# Altium PCB Logic-Analyzer-01.PcbDoc
Units mm, origin at the board's own origin, x right, y up, seen from the top; angles counter-clockwise.
Board outline 44 x 28 mm, 2 copper layers (Top Layer, Bottom Layer), stack 1.57 mm thick; 72 components, 58 nets, 254 pads, 50 vias.
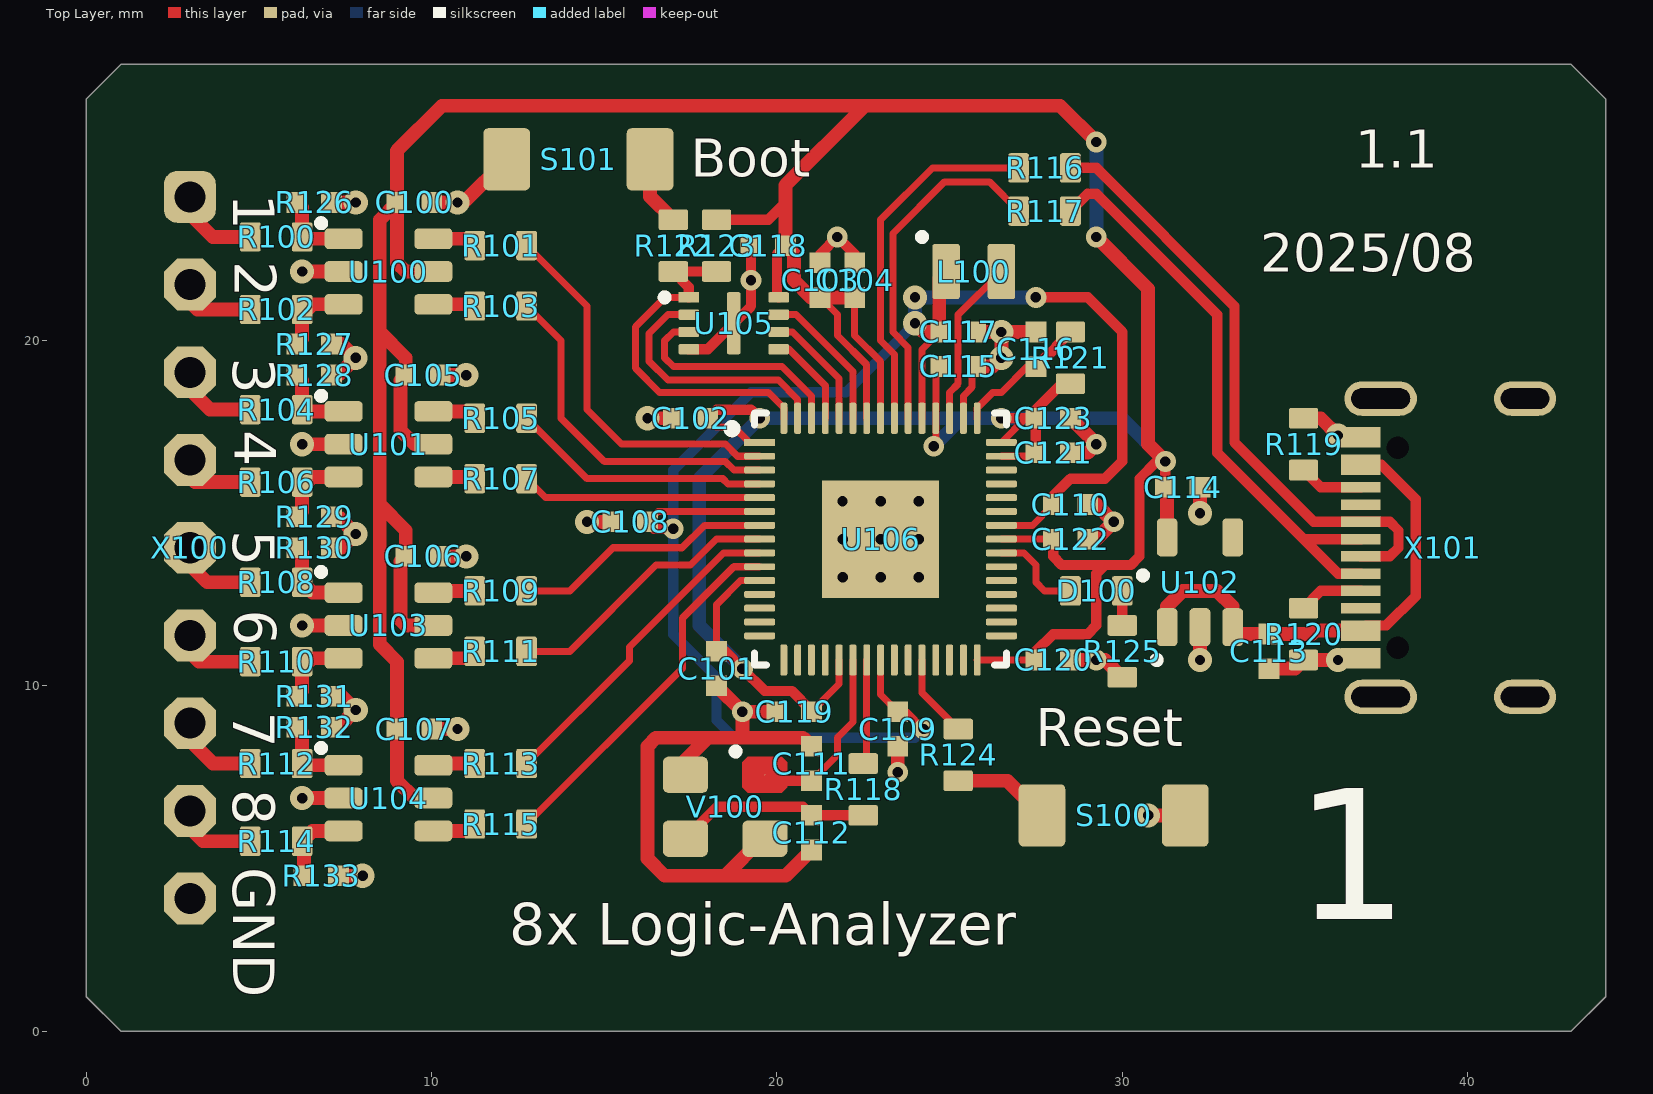
[diagram p0: Top Layer view]
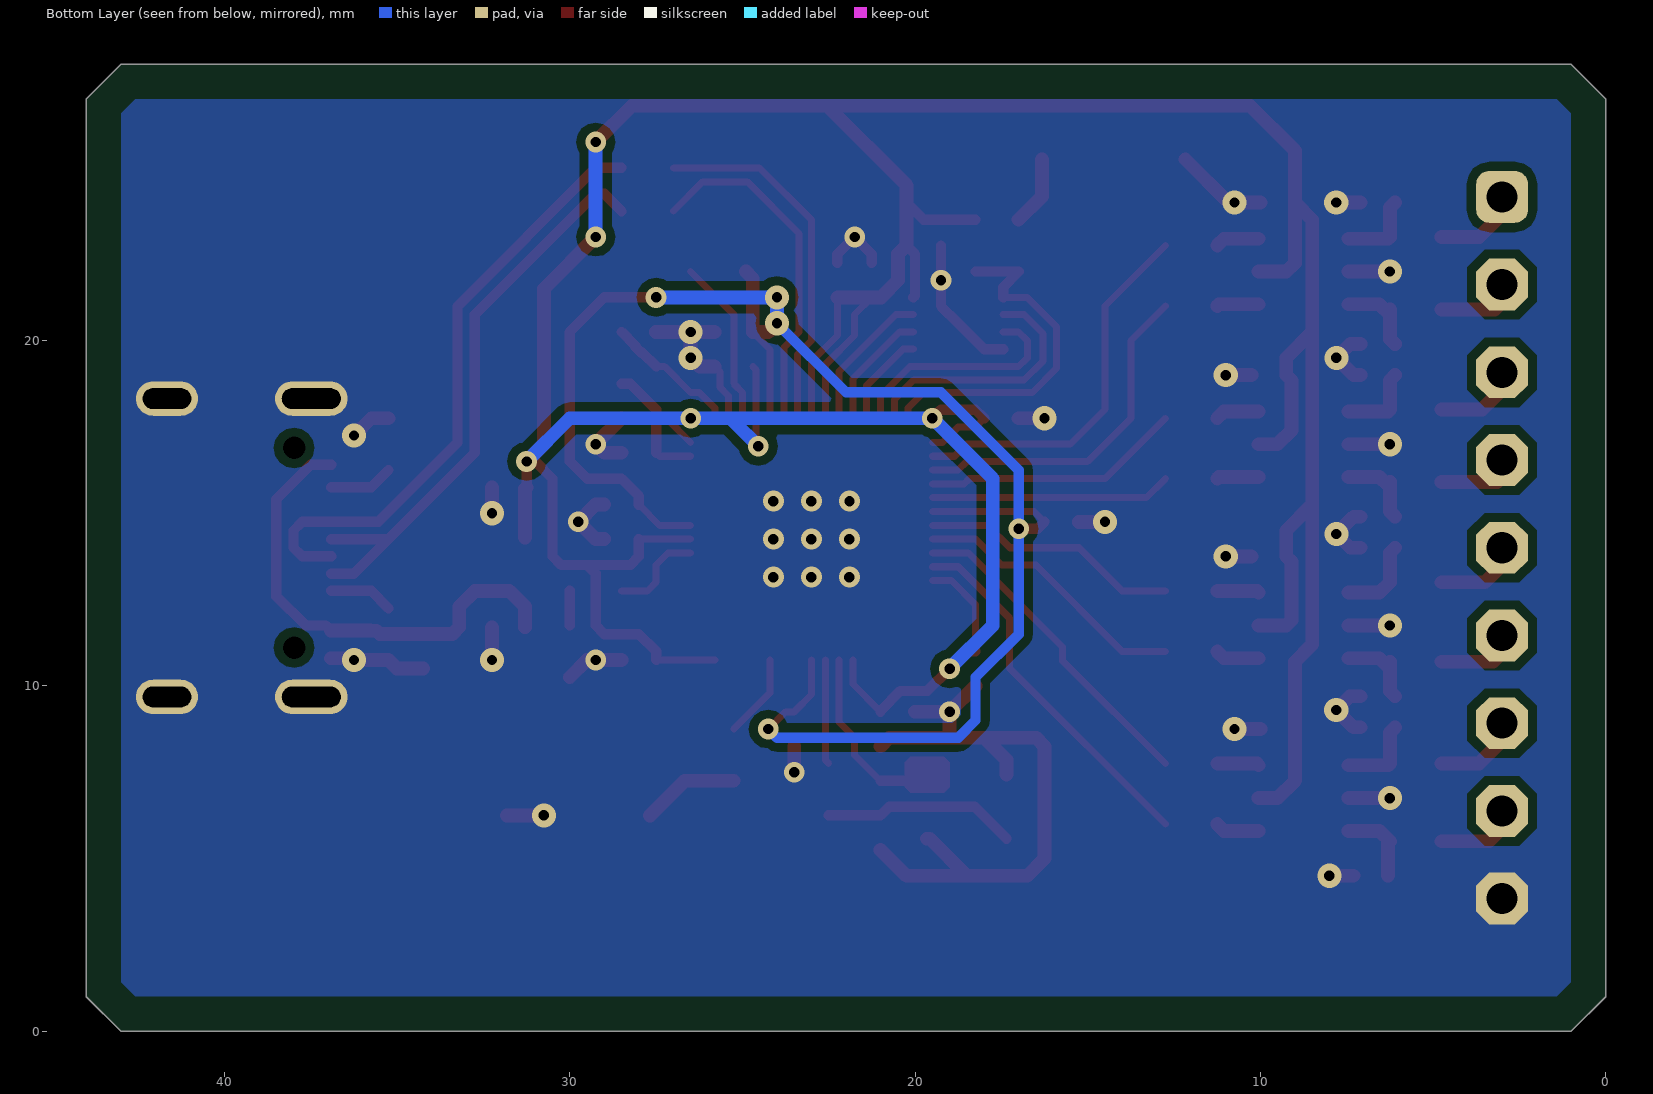
[diagram p1: Bottom Layer view, seen from below]
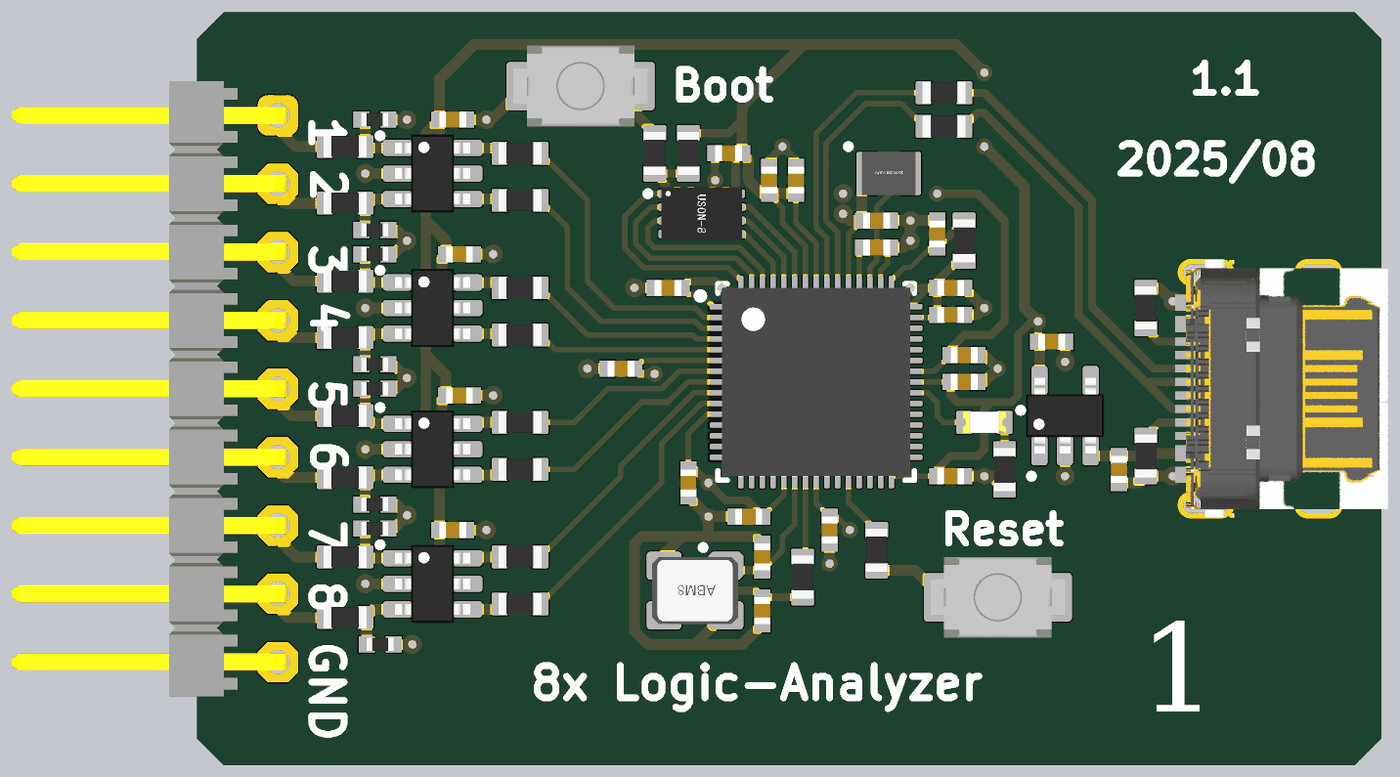
[diagram p2: 3D render of the assembled board from above, using the file's embedded part models]

## Layer stack, top to bottom
Top Solder: solder mask 0.01, Solder Resist, Dk 3.5
Top Layer: signal copper 0.035
Dielectric 1: dielectric 1.5, FR-4, Dk 4.8
Bottom Layer: signal copper 0.035
Bottom Solder: solder mask 0.01, Solder Resist, Dk 3.5

## Board outline
0,1 1,0 43,0 44,1 44,27 43,28 1,28 0,27

## Design rules (kind name [scope] priority, off if disabled: settings)
BoardOutlineClearance [All] p1: gap=1 ignorepadtopadclearanceinfootprint=FALSE except(1.5: THPad-OutlineEdge THPad-CavityEdge THPad-CutoutEdge THPad-SplitBarrior THPad-SplitContinuation)
Clearance 16 [InNet('12V')] p1: gap=0.254 ignorepadtopadclearanceinfootprint=FALSE except(0: Arc-Hole Track-Hole SMDPad-Hole THPad-Hole Via-Hole Fill-Hole Poly-Hole Region-Hole Text-Hole; 0.406: Arc-Poly Track-Poly SMDPad-Poly THPad-Poly Via-Poly Fill-Poly Poly-Poly)
Clearance [All] p2: gap=0.152 ignorepadtopadclearanceinfootprint=FALSE except(0: Arc-Hole Track-Hole THPad-Hole Via-Hole Fill-Hole Region-Hole Text-Hole; 0.254: Arc-Poly Track-Poly SMDPad-Poly THPad-Poly Via-Poly Fill-Poly Poly-Poly Poly-Hole) // 1
HoleSize [All] p1: absolutevalues=TRUE maxlimit=5.08 minlimit=0.3 maxpercent=80.000 minpercent=20.000
MinimumSolderMaskSliver [All] p1: minsoldermaskwidth=0.051
PasteMaskExpansion [All] p1 off: expansion=0
PolygonConnect [All] p1: connectstyle=Direct reliefconductorwidth=0.406 reliefentries=4 polygonreliefangle="90 Angle" airgapwidth=0.254
RoutingVias [All] p1: holewidth=0.3 width=0.6 viastyle="Through Hole" minholewidth=0.3 minwidth=0.6 maxholewidth=4 maxwidth=5
SilkToBoardRegionClearance [All] p1 off:
SilkToSilkClearance [All] p1 off: silktosilkclearance=0.254
SilkToSolderMaskClearance [IsPad] p1 off: minsilkscreentomaskgap=0.254 clearancetoexposedcopper=TRUE
SolderMaskExpansion [All] p1: expansion=0.051 istentingtop=FALSE
Width [All] p1: maxlimit=2.54 minlimit=0.203 preferedwidth=0.406 minimp=50.000000 maximp=50.000000 favimp=50.000000
24 further rules are at their usual default settings.

## Components (designator, comment, footprint, x,y, rotation, side; value= is the part's Value field where it differs from the comment)
C100 "100n" CAPC1005X06N#1 9.5,24 r180 top
C101 "100n" CAPC1005X06N#1 18.25,10.5 r90 top
C102 "100n" CAPC1005X06N#1 17.5,17.75 r0 top
C103 "100n" CAPC1005X06N#1 21.25,21.75 r270 top
C104 "100n" CAPC1005X06N#1 22.25,21.75 r270 top
C105 "100n" CAPC1005X06N#1 9.75,19 r180 top
C106 "100n" CAPC1005X06N#1 9.75,13.75 r180 top
C107 "100n" CAPC1005X06N#1 9.5,8.75 r180 top
C108 "100n" CAPC1005X06N#1 15.75,14.75 r0 top
C109 "100n" CAPC1005X06N#1 23.5,8.75 r90 top
C110 "100n" CAPC1005X06N#1 28.5,15.25 r180 top
C111 "15p" CAPC1005X06N#1 21,7.75 r270 top
C112 "15p" CAPC1005X06N#1 21,5.75 r90 top
C113 "4µ7" CAPC1005X06N#1 34.25,11 r90 top
C114 "4µ7" CAPC1005X06N#1 31.75,15.75 r180 top
C115 "4µ7" CAPC1005X06N#2 25.25,19.25 r180 top
C116 "4µ7" CAPC1005X06N#1 27.5,19.75 r270 top
C117 "4µ7" CAPC1005X06N#2 25.25,20.25 r180 top
C118 "100n" CAPC1005X06N#1 19.75,22.75 r0 top
C119 "100n" CAPC1005X06N#1 20.5,9.25 r0 top
C120 "100n" CAPC1005X06N#1 28,10.75 r180 top
C121 "100n" CAPC1005X06N#1 28,16.75 r180 top
C122 "100n" CAPC1005X06N#1 28.5,14.25 r180 top
C123 "100n" CAPC1005X06N#1 28,17.75 r180 top
D100 "red" DIOC1608X06N_LED 29.25,12.75 r180 top
L100 "AOTA-B201610S3R3-101-T" PowerInductor_2.0x1.6 25.7,22 r0 top
R100 "51" RESC1608X06L 5.5,23 r0 top
R101 "51" RESC1608X06L 12,22.75 r0 top
R102 "51" RESC1608X06L 5.5,20.9 r0 top
R103 "51" RESC1608X06L 12,21 r0 top
R104 "51" RESC1608X06L 5.5,18 r0 top
R105 "51" RESC1608X06L 12,17.75 r0 top
R106 "51" RESC1608X06L 5.5,15.9 r0 top
R107 "51" RESC1608X06L 12,16 r0 top
R108 "51" RESC1608X06L 5.5,13 r0 top
R109 "51" RESC1608X06L 12,12.75 r0 top
R110 "51" RESC1608X06L 5.5,10.7 r0 top
R111 "51" RESC1608X06L 12,11 r0 top
R112 "51" RESC1608X06L 5.5,7.75 r0 top
R113 "51" RESC1608X06L 12,7.75 r0 top
R114 "51" RESC1608X06L 5.5,5.5 r0 top
R115 "51" RESC1608X06L 12,6 r0 top
R116 "27R" RESC1608X06L 27.75,25 r180 top
R117 "27R" RESC1608X06L 27.75,23.75 r180 top
R118 "1k" RESC1608X06L 22.5,7 r270 top
R119 "5k1" RESC1608X06L 35.25,17 r270 top
R120 "5k1" RESC1608X06L 35.25,11.5 r90 top
R121 "27R" RESC1608X06L 28.5,19.5 r270 top
R122 "1k" RESC1608X06L 17,22.75 r270 top
R123 "10k" RESC1608X06L 18.25,22.75 r90 top
R124 "1k" RESC1608X06L 25.25,8 r90 top
R125 "10k" RESC1608X06L 30,11 r270 top
R126 "100k" RESC1005X06N 6.6,24 r0 top
R127 "100k" RESC1005X06N 6.6,19.9 r0 top
R128 "100k" RESC1005X06N 6.6,19 r0 top
R129 "100k" RESC1005X06N 6.6,14.9 r0 top
R130 "100k" RESC1005X06N 6.6,14 r0 top
R131 "100k" RESC1005X06N 6.6,9.7 r0 top
R132 "100k" RESC1005X06N 6.6,8.8 r0 top
R133 "100k" RESC1005X06N 6.8,4.5 r0 top
S100 "TS-1088-AR02016" TS-1088-AR02016 29.75,6.25 r0 top
S101 "TS-1088-AR02016" TS-1088-AR02016 14.25,25.25 r180 top
U100 "74LVC2G17" SOT95P280X110-6N 8.75,22 r0 top
U101 "74LVC2G17" SOT95P280X110-6N 8.75,17 r0 top
U102 "TPLP5907MFX-3.3" SOT95P280X110-5N 32.25,13 r90 top
U103 "74LVC2G17" SOT95P280X110-6N 8.75,11.75 r0 top
U104 "74LVC2G17" SOT95P280X110-6N 8.75,6.75 r0 top
U105 "XT25F16FDTIGT-S" USONP50X200X300X8N 18.75,20.5 r0 top
U106 "RP2350A" QFN40P700X700X085-60EP 23,14.25 r0 top
V100 "12MHz" ABM8 18.5,6.5 r180 top
X100 "1x9 2,54mm" PINH_1x09_2_54mm_RA 3,14 r270 top
X101 "USB-C_16p" USBC_16P 40.5,14 r90 top

## Footprints (in the part's own frame and the unit in brackets; to place one, negate y for a bottom-side part, rotate by r counter-clockwise, add the part's x,y. Pads: shape width x height; smd on the part's side, far side on the other; paste and mask are expansions set on the pad)
ABM8 [mm]
  round 0.025 smd: 1(-1.15,-0.925)
  rrect30% 1.3x1.05 smd: 2(1.15,-0.925) 3(1.15,0.925) 4(-1.15,0.925)
  Top Layer region: -0.657,-1.45 -0.5,-1.292 -0.5,-0.557 -0.657,-0.4 -1.643,-0.4 -1.8,-0.557 -1.8,-1.292 -1.643,-1.45
  silkscreen extent -0.38,-1.67 -0.23,-1.53, body extent -1.6,-1.25 1.6,1.25, height 0.8
CAPC1005X06N#1 [mm] "Chip Capacitor, 2-Leads, Body 1,0x0,5mm, IPC Medium Density"
  rect 0.6x0.6 smd: 1(-0.5,0) 2(0.5,0)
  body extent -0.5,-0.3 0.5,0.3, height 0.5
CAPC1005X06N#2 [mm] "Chip Capacitor, 2-Leads, Body 1,0x0,5mm, IPC Medium Density"
  rect 0.5x0.6 smd: 1(-0.55,0) 2(0.55,0)
  body extent -0.5,-0.3 0.5,0.3, height 0.5
DIOC1608X06N_LED [mm]
  rrect20% 0.6x0.85 smd: 1(-0.75,0) 2(0.75,0)
  body extent -0.8,-0.4 0.8,0.4, height 0.7
PINH_1x09_2_54mm_RA [mm] "Pin-Header 9, right angled"
  rrect50% 1.5x1.5 hole 0.9: 1(-10.16,0)
  oct 1.5x1.5 hole 0.9: 2(-7.62,0) 3(-5.08,0) 4(-2.54,0) 5(0,0) 6(2.54,0) 7(5.08,0) 8(7.62,0) 9(10.16,0)
  body extent -11.43,-9.88 11.43,0.34, height 3.07
PowerInductor_2.0x1.6 [mm]
  rrect20% 0.8x1.6 smd: 1(-0.8,0) 2(0.8,0)
  silkscreen extent -1.57,0.93 -1.42,1.07, body extent -1,-0.8 1,0.8, height 1
QFN40P700X700X085-60EP [mm]
  rect 0.9x0.2 smd mask+0.1: 1(-3.5,2.8)
  rrect50% 0.9x0.2 smd mask+0.1: 2(-3.5,2.4) 3(-3.5,2) 4(-3.5,1.6) 5(-3.5,1.2) 6(-3.5,0.8) 7(-3.5,0.4) 8(-3.5,0) 9(-3.5,-0.4) 10(-3.5,-0.8) 11(-3.5,-1.2) 12(-3.5,-1.6) 13(-3.5,-2) 14(-3.5,-2.4) 15(-3.5,-2.8)
  rrect50% 0.2x0.9 smd: 16(-2.8,-3.5) 17(-2.4,-3.5) 18(-2,-3.5) 19(-1.6,-3.5) 20(-1.2,-3.5) 21(-0.8,-3.5) 22(-0.4,-3.5) 23(0,-3.5) 24(0.4,-3.5) 25(0.8,-3.5) 26(1.2,-3.5) 27(1.6,-3.5) 28(2,-3.5) 29(2.4,-3.5) 30(2.8,-3.5) 46(2.8,3.5) 47(2.4,3.5) 48(2,3.5) 49(1.6,3.5) 50(1.2,3.5) 51(0.8,3.5) 52(0.4,3.5) 53(0,3.5) 54(-0.4,3.5) 55(-0.8,3.5) 56(-1.2,3.5) 57(-1.6,3.5) 58(-2,3.5) 59(-2.4,3.5) 60(-2.8,3.5)
  rrect50% 0.9x0.2 smd: 31(3.5,-2.8) 32(3.5,-2.4) 33(3.5,-2) 34(3.5,-1.6) 35(3.5,-1.2) 36(3.5,-0.8) 37(3.5,-0.4) 38(3.5,0) 39(3.5,0.4) 40(3.5,0.8) 41(3.5,1.2) 42(3.5,1.6) 43(3.5,2) 44(3.5,2.4) 45(3.5,2.8)
  rect 3.4x3.4 smd: 61(0,0)
  silkscreen extent -4.42,-3.65 3.65,3.65, body extent -3.5,-3.5 3.5,3.5, height 0.85
RESC1005X06N [mm] "Chip Capacitor, 2-Leads, Body 1,0x0,5mm, IPC Medium Density"
  rect 0.6x0.6 smd: 1(-0.5,0) 2(0.5,0)
  body extent -0.5,-0.25 0.5,0.25, height 0.3
RESC1608X06L [mm] "Chip Resistor, 2-Leads, Body 1,6x0,8mm, IPC High Density"
  rrect20% 0.6x0.85 smd: 1(-0.75,0) 2(0.75,0)
  body extent -0.8,-0.4 0.8,0.4, height 0.4
SOT95P280X110-5N [mm] "SOT23, 5-Leads, Body 3,0x3,0mm (max), Pitch 0,95mm, IPC Medium Density"
  rrect40% 1.1x0.6 smd: 1(-1.3,0.95) 2(-1.3,0) 3(-1.3,-0.95) 4(1.3,-0.95) 5(1.3,0.95)
  body extent -1.4,-1.45 1.4,1.45, height 1.45
SOT95P280X110-6N [mm] "SOT23, 6-Leads, Body 3,0x3,0mm (max), Pitch 0,95mm, IPC Medium Density"
  rrect40% 1.1x0.6 smd: 1(-1.3,0.95) 2(-1.3,0) 3(-1.3,-0.95) 4(1.3,-0.95) 5(1.3,0) 6(1.3,0.95)
  body extent -1.4,-1.45 1.4,1.45, height 1.45
TS-1088-AR02016 [mm] "Tact Switch, 4x3x2"
  rrect20% 1.35x1.8 smd: 1(-2.075,0) 2(2.075,0)
  body extent -2.5,-1.5 2.5,1.5, height 2
USBC_16P [mm]
  round 0 hole 0.65 unplated: 1(-2.89,2.515) 1(2.89,2.515)
  rect 0.6x1.15 smd paste+0 mask+0: A1-B12(-3.2,3.59) A4-B9(-2.4,3.59) B1-A12(3.2,3.59) B4-A9(2.4,3.59)
  rect 0.3x1.15 smd paste+0 mask+0: A5(-1.25,3.59) A6(-0.25,3.59) A7(0.25,3.59) A8(1.25,3.59) B5(1.75,3.59) B6(0.75,3.59) B7(-0.75,3.59) B8(-1.75,3.59)
  rrect100% 1x1.8 hole 1.4 slot 0.6 at 0 deg paste-2539.97 mask+0: SHIELD(-4.32,-1.165) SHIELD(4.32,-1.165)
  rrect100% 1x2.1 hole 1.7 slot 0.6 at 0 deg paste-2539.97 mask+0: SHIELD(-4.32,3.015) SHIELD(4.32,3.015)
  body extent -4.79,-3.76 4.79,3.77, height 3.26
USONP50X200X300X8N [mm]
  rect 0.6x0.3 smd mask+0.05: 1(-1.3,0.75)
  rrect30% 0.6x0.3 smd mask+0.05: 2(-1.3,0.25) 3(-1.3,-0.25) 4(-1.3,-0.75) 5(1.3,-0.75) 6(1.3,-0.25) 7(1.3,0.25) 8(1.3,0.75)
  rrect30% 0.4x1.8 smd mask+0.05: 9(0,0)
  silkscreen extent -2.07,0.68 -1.92,0.82, body extent -1.5,-1 1.5,1, height 0.53

## Part data
C100 C101 C102 C103 C104 C105 C106 C107 C108 C109 C110 C111 C112 C113 C114 C115 C116 C117 C118 C119 C120 C121 C122 C123: library part CAPC_0402, "0402 Chip Capacitor", Categorie=generic, Date=19.07.2025, Editor=rriedel, Group=Capacitor, PackageDescription=0402, Part Number=CAPC_0402, Status=tested, Type=unpolarized
D100: library part LED_0603, "LED, 0603", Categorie=generic, Date=29.06.2020, Editor=rriedel, Group=Diode, PackageDescription=0603, Part Number=LED_0603, Status=tested, Type=generic
L100: "3.3µH, 2.8A, 2.0mm x 1.6mm x 1.0mm", Manufacturer=Abracom, Categorie=Part, Date=17.08.2025, Distributor_1=JLCBCP, Distributor_1_Part_Number=C42411119, Editor=rriedel, Group=Inductor, PackageDescription="2.0mm x 1.6mm", Part Number=AOTA-B201610S3R3-101-T, Part_Number_1=AOTA-B201610S3R3-101-T, Status=new, Type=Power
R100 R101 R102 R103 R104 R105 R106 R107 R108 R109 R110 R111 R112 R113 R114 R115 R116 R117 R118 R119 R120 R121 R122 R123 R124 R125: library part RESC_0603, "0603 Chip Resistor", Categorie=generic, Editor=rriedel, Group=Resistor, PackageDescription=0603, Part Number=RESC_0603, Status=tested, Type=generic
R126 R127 R128 R129 R130 R131 R132 R133: library part RESC_0402, "0402 Chip Resistor", Categorie=generic, Date=19.07.2025, Editor=rriedel, Group=Resistor, PackageDescription=0402, Part Number=RESC_0402, Status=tested, Type=generic
S100 S101: "Tact Switch, 4x3x2, 2pin, 12V/50mA", Manufacturer=XunPu, Categorie=Part, Date=04.06.2022, Distributor_1=LCSC, Distributor_1_Part_Number=C720477, Editor=rriedel, Group=Electromechanical, PackageDescription="4mm x 3mm", Part Number=TS-1088-AR02016, Part_Number_1=TS-1088-AR02016, Status=tested, Type=Switch
U100 U101 U103 U104: "Dual Schmitt-Trigger Buffer with 5.5V tolerant inputs", Manufacturer=TI, Categorie=Part, Date=08.05.2020, Distributor_1=Digi-Key, Distributor_1_Part_Number=296-SN74LVC2G17DBVRCT-ND‎, Editor=rriedel, Group=IC, PackageDescription=SOT23-6, Part Number=74LVC2G17, Part_Number_1=74LVC2G17DBVR, Status=tested, Type=Logic
U102: library part MIC5233-3.3, "100 mA LDO,  Vout= 3,3V, -40°C..125°C", Manufacturer=Microchip, Bauteilart=IC, Date=15.09.2016, Distributor_1=Farnell, Distributor_1_Part_Number=2510274, Editor=rriedel, Kategorie=Part, PackageDescription=SOT23-5, Part Number=MIC5233-3.3, Part_Number_1=MIC5233-3.3YM5, Status=tested, Unterart=Linear-Regulators
U105: "SPI NOR FLASH, 16MBit", Manufacturer=XTX, Categorie=Part, Date=17.07.2025, Distributor_1=JLCBCP, Distributor_1_Part_Number=C29781641, Editor=rriedel, Group=IC, PackageDescription=USON8, Part Number=XT25F16FDTIGT-S, Part_Number_1=XT25F16FDTIGT-S, Status=tested, Type=Memory
U106: "32-bit Microcontroller, 2x 150MHz Cortex M33", Manufacturer=Raspberry, Categorie=Part, Date=17.07.2025, Editor=rriedel, Group=MicroController, PackageDescription=QFN60EP, Part Number=RP2350A, Part_Number_1=RP2350A, Status=tested, Type="32bit Raspberry"
V100: library part ABM8-272-T3, "-40℃~+85℃, 12MHz, Cl=10pF, ±30ppm, SMD3225-4P", Manufacturer=Abracom, Categorie=Part, Date=17.08.2025, Distributor_1=JLCBCP, Distributor_1_Part_Number=C20625731, Editor=rriedel, Group=Crystal, PackageDescription="3.2mm x 2.5mm", Part Number=ABM8-272-T3, Part_Number_1=ABM8-272-T3, Status=new, Type=Misc
X100: library part PINH_1x9_2_54, "Pin-Header 2,54 mm 9pins", Categorie=generic, Date=11.05.2025, Editor=rriedel, Group=Connector, Part Number=PINH_1x9_2_54, Status=tested, Type=Pin-Header
X101: "SMD USB-C 16p", Categorie=Part, Date=19.07.2025, Distributor_1=JLCBCP, Distributor_1_Part_Number=C2765186, Editor=rriedel, Group=Connector, PackageDescription=USB-C_16p, Part Number=USB-C_16p, Status=tested, Type=USB

## Via types
v1: diameter 0.7, hole 0.3, Top Layer to Bottom Layer, tented both sides, 24 vias
v2: diameter 0.6, hole 0.3, Top Layer to Bottom Layer, tented both sides, 17 vias
v3: diameter 0.61, hole 0.305, Top Layer to Bottom Layer, tented both sides, 8 vias
v4: diameter 0.61, hole 0.3, Top Layer to Bottom Layer, tented both sides, 1 vias

## Nets (pads, with @x,y where several pads share a name; then routed paths per layer and width w, separated by ;. In a path a pad name is that pad's centre, name@x,y a point inside that pad or via, vN(x,y) a via of type N, cw(c..) or ccw(c..) an arc to the next point about the centre after c; other vN are vias at no path point)
1V1: C108.2 C109.2 C110.2 C117.2 L100.1 U106.6 U106.23 U106.39 U106.50 | length 50.4
  Top Layer w0.203: C108.2 16.55,15.05 U106.6 ; U106.23 23,9.75 C109.2 23.75,9.25 v2(24.25,8.75) ; U106.50 24.2,18.841 24.196,18.845 24.196,19.746 C117.2 ; U106.39 27.4,14.65 C110.2
  Top Layer w0.3: C108.2 16.446,14.554 v2(17,14.554) ; v2(27.5,21.25) 29,21.25 30,20.25 30,16.5 29.5,16 28.5,16 28,15.5 C110.2
  Top Layer w0.4: v1(24,20.5) 24.25,20.25 C117.2 24.7,21.8 L100.1
  Bottom Layer w0.3: v1(24,20.5) 22,18.5 19.25,18.5 17,16.25 v2(17,14.554) 17,11.5 18.25,10.25 18.25,9 18.75,8.5 24,8.5 v2(24.25,8.75)
  Bottom Layer w0.4: v1(24,20.5) v1(24,21.25) v2(27.5,21.25)
3V3: C100.2 C101.2 C102.2 C103.2 C104.2 C105.2 C106.2 C107.2 C114.2 C115.2 C118.2 C119.2 C120.2 C121.2 C122.2 C123.2 R121.2 R123.2 U100.5 U101.5 U102.5 U103.5 U104.5 U105.8 U106.1 U106.11 U106.20 U106.30 U106.38 U106.44 U106.45 U106.49 U106.53 U106.54 | length 140.5
  Top Layer w0.203: C102.2 18.25,17.5 18.75,17.5 19.2,17.05 U106.1 ; C101.2 18.25,12.35 18.95,13.05 U106.11 ; C119.2 21.8,10.05 U106.20 ; C103.2 21.75,20.75 21.75,20.15 22.6,19.3 U106.54 ; C104.2 22.25,20.15 23,19.4 U106.53 ; v2(24.542,16.941) 24.6,16.999 U106.49 24.6,19.15 C115.2 ; U106.30 C120.2 ; U106.38 C122.2 ; U106.44 27.4,16.65 C121.2 ; U106.45 C123.2@27.2,17.75
  Top Layer w0.3: C102.2 18.25,18 19.25,18 v2(19.5,17.75) ; C101.2 18.5,11 v2(19,10.5) 19.648,9.852 20.425,9.852 21,9.278 C119.2 ; R123.2 19.75,23.5 20.25,24 ; U105.8 20,21.3 20,22.5 C118.2 ; v2(26.5,17.75) 27.2,17.75 C123.2 ; C120.2 27.5,11 28,11.5 29,11.5 29.25,11.75 29.25,13.25 29.5,13.5 ; C121.2 C123.2 ; C122.2 28,13.75 28.25,13.5 29.5,13.5 ; R121.2 28.25,18.75 27.5,18 C123.2 ; C114.2 v2(31.25,16.5) 31,16.5 30.5,16 30.5,13.75 30.25,13.5 29.5,13.5
  Top Layer w0.4: U104.5 9.5,6.75 9,7.25 C107.2 9,10.7 8.5,11.2 8.5,15.25 ; U103.5 9.25,11.75 9.1,11.9 9.1,13.6 C106.2 9.25,14.5 8.5,15.25 ; U101.5 9.5,17 9.1,17.4 9.1,18.85 C105.2 9.25,19.5 8.5,20.25 ; U100.5 9.25,22 9,22.25 C100.2 ; C104.2 C103.2 20.987,21.25 20.491,21.746 20.491,22.509 C118.2 20.25,24 20.25,24.5 22.5,26.75 22.45,26.8 ; v2(29.25,23) 30.75,21.5 30.75,17 31.125,16.625 v2(31.25,16.5) ; v2(29.25,25.75) 28.2,26.8 22.45,26.8 ; C114.2 31.3,15.7 U102.5 ; 8.5,15.25 8.5,20.25 ; 8.5,20.25 8.5,23.5 C100.2 ; C100.2 9,25.5 10.3,26.8 22.45,26.8
  Bottom Layer w0.4: v2(19,10.5) 17.75,11.75 17.75,16 v2(19.5,17.75) 25.25,17.75 ; v2(24.542,16.941) 25.25,17.649 25.25,17.75 ; v2(29.25,23) v2(29.25,25.75) ; v2(31.25,16.5) 30,17.75 v2(26.5,17.75) 25.25,17.75
GND: C100.1 C101.1 C102.1 C103.1 C104.1 C105.1 C106.1 C107.1 C108.1 C109.1 C110.1 C111.1 C112.1 C113.1 C114.1 C115.1 C116.1 C117.1 C118.1 C119.1 C120.1 C121.1 C122.1 C123.1 R119.1 R120.1 R125.2 R126.2 R127.2 R128.2 R129.2 R130.2 R131.2 R132.2 R133.2 S100.2 S101.2 U100.2 U101.2 U102.2 U103.2 U104.2 U105.4 U105.9 U106.47 U106.61 V100.2 V100.4 X100.9 X101.A1-B12 X101.B1-A12 X101.SHIELD | length 61.1
  Top Layer w0.203: U106.47 25.4,18.397 25.652,18.649 25.652,19.102 C115.1
  Top Layer w0.3: U105.4 18,19.75 U105.9 19.25,21 v2(19.25,21.75) C118.1 ; C103.1 21.25,22.5 v2(21.75,23) 22.25,22.5 C104.1
  Top Layer w0.4: v1(6.25,6.75) U104.2 ; v1(6.25,11.75) U103.2 ; v1(6.25,17) U101.2 ; v1(6.25,22) U100.2 ; R132.2 7.3,8.8 v1(7.8,9.3) 7.4,9.7 R131.2 ; R130.2 7.398,14 v1(7.798,14.4) 7.298,14.9 R129.2 ; R128.2 7.298,19 v1(7.798,19.5) 7.398,19.9 R127.2 ; R126.2 v1(7.8,24) ; R133.2 v1(8,4.5) ; C107.1 v1(10.75,8.75) ; C100.1 v1(10.75,24) 10.925,24 S101.2 ; C106.1 v1(11,13.75) ; C105.1 v1(11,19) ; v1(14.5,14.75) C108.1 ; v1(16.25,17.75) C102.1 ; V100.2 17.35,7.85 18,8.5 ; C101.1 v2(19,9.25) ; V100.4 19.575,5.575 18.5,4.5 ; C119.1 v2(19,9.25) ; C112.1 20.25,4.5 18.5,4.5 ; C111.1 20.75,8.5 19,8.5 ; v2(23.5,7.5) C109.1 ; C115.1 26.25,19.25 v1(26.5,19.5) v1(26.5,20.25) ; C117.1 v1(26.5,20.25) ; C116.1 v1(26.5,20.25) ; C120.1 v2(29.25,10.75) 29.5,10.75 R125.2 ; C121.1 29,16.75 v2(29.25,17) C123.1 ; C122.1 29.25,14.25 v2(29.75,14.75) 29.25,15.25 C110.1 ; v1(30.75,6.25) S100.2 ; v1(32.25,10.75) U102.2 ; v1(32.25,15) C114.1 ; C113.1 35,10.5 R120.1 v1(36.25,10.75) 36.3,10.8 X101.A1-B12 ; R119.1 35.75,17.75 v1(36.25,17.25) ; 18,8.5 19,8.5 ; 18,8.5 16.5,8.5 16.25,8.25 16.25,5 16.75,4.5 18.5,4.5 ; 19,8.5 v2(19,9.25)
  other v3: 21.9,13.15 23,13.15 24.1,13.15 21.9,14.25 23,14.25 24.1,14.25 23,15.35 24.1,15.35
  other v4: 21.9,15.35
IN_01: R101.2 U106.2 | length 11
  Top Layer w0.203: R101.2 14.5,21 14.5,18 15.5,17 18.506,17 18.856,16.65 U106.2
IN_02: R103.2 U106.3 | length 10
  Top Layer w0.203: R103.2 13.75,20 13.75,17.75 15,16.5 18.503,16.5 18.753,16.25 U106.3
IN_03: R105.2 U106.4 | length 7.5
  Top Layer w0.203: R105.2 14.5,16 18.431,16 18.581,15.85 U106.4
IN_04: R107.2 U106.5 | length 7
  Top Layer w0.203: R107.2 13.3,15.45 U106.5
IN_05: R109.2 U106.7 | length 7.5
  Top Layer w0.203: R109.2 14,12.75 15.25,14 17.25,14 17.9,14.65 U106.7
IN_06: R111.2 U106.8 | length 8.1
  Top Layer w0.203: R111.2 14,11 16.5,13.5 17.5,13.5 18.25,14.25 U106.8
IN_07: R113.2 U106.9 | length 9.5
  Top Layer w0.203: R113.2 15.727,10.727 15.727,11.127 18.45,13.85 U106.9
IN_08: R115.2 U106.10 | length 10.7
  Top Layer w0.203: R115.2 17.259,10.509 17.259,11.959 18.75,13.45 U106.10
NetC111_2: C111.2 U106.21 V100.1 | length 5.4
  Top Layer w0.203: C111.2 21.75,8 21.75,8.5 22.2,8.95 U106.21
  Top Layer w0.3: V100.1 19.825,7.25 C111.2
NetC112_2: C112.2 R118.2 V100.3 | length 5.6
  Top Layer w0.3: V100.3 18.275,6.5 20.75,6.5 C112.2 R118.2
NetC116_2: C116.2 R121.1 U106.46 | length 3.9
  Top Layer w0.203: U106.46 25.8,18.05 26.25,18.5 26.5,18.5 27.25,19.25 C116.2
  Top Layer w0.3: C116.2 27.898,19.648 27.925,19.648 28.102,19.825 28.102,19.852 R121.1
NetD100_1: D100.1 R125.1 | length 1
  Top Layer w0.3: R125.1 D100.1
NetD100_2: D100.2 U106.37 | length 2.7
  Top Layer w0.203: U106.37 27.15,13.85 27.5,13.5 27.5,13 27.75,12.75 D100.2
NetL100_2: L100.2 U106.48 | length 4.9
  Top Layer w0.203: U106.48 25,18.5 25.25,18.75 25.25,20.75 L100.2
NetR100_2: R100.2 R126.1 U100.1 | length 2.3
  Top Layer w0.4: R126.1 6.25,23.85 R100.2 6.3,22.95 U100.1
NetR101_1: R101.1 U100.6 | length 1.3
  Top Layer w0.4: U100.6 11.05,22.95 R101.1
NetR102_2: R102.2 R127.1 U100.3 | length 2.4
  Top Layer w0.4: R127.1 6.25,20.05 R102.2@6.25,20.75 ; R102.2 R102.2@6.25,20.75 ; U100.3 6.55,21.05 R102.2@6.25,20.75
NetR103_1: R103.1 U100.4 | length 1.2
  Top Layer w0.4: U100.4 11.2,21.05 R103.1
NetR104_2: R104.2 R128.1 U101.1 | length 2.3
  Top Layer w0.4: R128.1 6.25,18.85 R104.2 6.3,17.95 U101.1
NetR105_1: R105.1 U101.6 | length 1.3
  Top Layer w0.4: U101.6 11.05,17.95 R105.1
NetR106_2: R106.2 R129.1 U101.3 | length 2.3
  Top Layer w0.4: R129.1 6.25,15.05 R106.2 ; R106.2@6.325,15.825 6.55,16.05 U101.3
NetR107_1: R107.1 U101.4 | length 1.2
  Top Layer w0.4: U101.4 11.2,16.05 R107.1
NetR108_2: R108.2 R130.1 U103.1 | length 2.4
  Top Layer w0.4: R130.1 6.25,13.85 R108.2 6.55,12.7 U103.1
NetR109_1: R109.1 U103.6 | length 1.2
  Top Layer w0.4: U103.6 10.1,12.75 R109.1
NetR110_2: R110.2 R131.1 U103.3 | length 2.2
  Top Layer w0.4: R131.1 6.25,9.85 R110.2 ; R110.2@6.35,10.6 6.55,10.8 U103.3
NetR111_1: R111.1 U103.4 | length 1.3
  Top Layer w0.4: U103.4 11.05,10.8 R111.1
NetR112_2: R112.2 R132.1 U104.1 | length 2.3
  Top Layer w0.4: R132.1 6.25,8.65 R112.2 6.3,7.7 U104.1
NetR113_1: R113.1 U104.6 | length 1.2
  Top Layer w0.4: U104.6 10.1,7.75 R113.1
NetR114_2: R114.2 R133.1 U104.3 | length 2.3
  Top Layer w0.4: R133.1 6.3,5.45 R114.2 6.55,5.8 U104.3
NetR115_1: R115.1 U104.4 | length 1.3
  Top Layer w0.4: U104.4 11.05,5.8 R115.1
NetR116_2: R116.2 U106.52 | length 10.5
  Top Layer w0.203: U106.52 23.4,19.6 23,20 23,23.5 24.5,25 R116.2
NetR117_2: R117.2 U106.51 | length 10.2
  Top Layer w0.203: U106.51 23.8,19.8 23.356,20.244 23.356,23.106 24.849,24.599 26.151,24.599 R117.2
NetR118_1: R118.1 U106.22 | length 3
  Top Layer w0.203: R118.1 22.6,7.85 U106.22
NetR119_2: R119.2 X101.B5 | length 1.9
  Top Layer w0.3: R119.2 35.75,15.75 X101.B5
NetR120_2: R120.2 X101.A5 | length 1.9
  Top Layer w0.3: R120.2 35.75,12.75 X101.A5
NetR122_1: R122.1 S101.1 | length 2
  Top Layer w0.4: S101.1 16.325,24.175 R122.1
NetR122_2: R122.2 R123.1 U105.1 U106.60 | length 10.4
  Top Layer w0.203: U105.1 16.75,21.25 15.9,20.4 15.9,19.2 16.6,18.5 19.75,18.5 20.2,18.05 U106.60
  Top Layer w0.3: U105.1 17.45,21.55 R122.2 R123.1
NetR124_1: R124.1 S100.1 | length 2.8
  Top Layer w0.4: R124.1 26.675,7.25 S100.1
NetU105_2: U105.2 U106.59 | length 7.5
  Top Layer w0.203: U105.2 16.85,20.75 16.3,20.2 16.3,19.4 16.844,18.856 20.042,18.856 20.598,18.299 20.598,17.752 U106.59
NetU105_3: U105.3 U106.58 | length 6.7
  Top Layer w0.203: U105.3 17,20.25 16.75,20 16.75,19.5 17,19.25 20.15,19.25 21,18.4 U106.58
NetU105_5: U105.5 U106.57 | length 2.7
  Top Layer w0.203: U105.5 20.35,19.75 21.4,18.7 U106.57
NetU105_6: U105.6 U106.56 | length 3.5
  Top Layer w0.203: U105.6 20.45,20.25 21.8,18.9 U106.56
NetU105_7: U105.7 U106.55 | length 4.2
  Top Layer w0.203: U105.7 20.55,20.75 22.2,19.1 U106.55
Reset: R124.2 U106.26 | length 2.4
  Top Layer w0.203: U106.26 24.2,9.8 R124.2
USB_DM: R117.1 X101.A7 X101.B7 | length 17.2
  Top Layer w0.3: R117.1 29,24.25 29.25,24.25 32.75,20.75 32.75,16.75 35.25,14.25 ; X101.B7 36.25,13.25 35.25,14.25 ; X101.A7 35.25,14.25
USB_DP: R116.1 X101.A6 X101.B6 | length 17.9
  Top Layer w0.3: R116.1 29.25,25 33.25,21 33.25,17.05 35.55,14.75 X101.B6 37.75,14.75 38,14.5 38,14 37.75,13.75 X101.A6
VBUS: C113.2 U102.1 U102.3 X101.A4-B9 X101.B4-A9 | length 14.1
  Top Layer w0.3: X101.A4-B9 37.06,11.75 37.65,11.75 38.5,12.6 38.5,15.4 37.5,16.4 X101.B4-A9
  Top Layer w0.4: U102.1 31.3,12.3 31.75,12.75 32.75,12.75 33.2,12.3 U102.3 33.4,11.5 C113.2 35.5,11.5 35.598,11.598 35.786,11.598 35.788,11.6 X101.A4-B9
X_IN_01: R100.1 X100.1 | length 2.7
  Top Layer w0.4: X100.1@2.5,24.16 3.66,23 R100.1
X_IN_02: R102.1 X100.2 | length 2.5
  Top Layer w0.4: X100.2@2.5,21.62 3.22,20.9 R102.1
X_IN_03: R104.1 X100.3 | length 2.7
  Top Layer w0.4: X100.3@2.5,19.08 3.58,18 R104.1
X_IN_04: R106.1 X100.4 | length 2.5
  Top Layer w0.4: X100.4@2.5,16.54 3.14,15.9 R106.1
X_IN_05: R108.1 X100.5 | length 2.7
  Top Layer w0.4: X100.5@2.5,14 3.5,13 R108.1
X_IN_06: R110.1 X100.6 | length 2.6
  Top Layer w0.4: X100.6@2.5,11.46 3.26,10.7 R110.1
X_IN_07: R112.1 X100.7 | length 2.7
  Top Layer w0.4: X100.7@2.5,8.92 3.67,7.75 R112.1
X_IN_08: R114.1 X100.8 | length 2.6
  Top Layer w0.4: X100.8@2.5,6.38 3.38,5.5 R114.1
pads on no net: U102.4 U106.12 U106.13 U106.14 U106.15 U106.16 U106.17 U106.18 U106.19 U106.24 U106.25 U106.27 U106.28 U106.29 U106.31 U106.32 U106.33 U106.34 U106.35 U106.36 U106.40 U106.41 U106.42 U106.43 X101.1 X101.A8 X101.B8

## Polygon pours and split planes (outlines as drawn)
GND on Bottom Layer "GND_L02_P000" (solid, remove dead copper, pour order 0): 0,28 0,0 44,0 44,28

## Silkscreen, mask and mechanical layers (free items; w line width, h text height)
Top Overlay:
  circle w0.254: c30.6,13.2 r0.075
  circle w0.254: c31,10.75 r0.075
  circle w0.254: c6.8,8.2 r0.075
  circle w0.254: c6.8,13.3 r0.075
  circle w0.254: c6.8,18.4 r0.075
  circle w0.254: c6.8,23.4 r0.075
  text "1.1" at 36.75,25 h1.1
  text "Boot" at 17.5,24.75 h1.1
  text "1" at 4.25,24.25 h1.2 r270
  text "2" at 4.3,22.3 h1.2 r270
  text "2025/08" at 34,22 h1.1
  text "3" at 4.25,19.5 h1.2 r270
  text "4" at 4.3,17.4 h1.2 r270
  text "5" at 4.25,14.5 h1.2 r270
  text "6" at 4.3,12.2 h1.2 r270
  text "7" at 4.25,9.25 h1.2 r270
  text "Reset" at 27.5,8.25 h1.1
  text "8" at 4.25,7 h1.2 r270
  text "GND" at 4.25,4.75 h1.2 r270
  text "8x Logic-Analyzer" at 12.25,2.5 h1.2
  text "1" at 35,2 h6.5
M1_Dimension:
  the board outline again, w0.254

## Dimensions
1,0 to 1,28 on M2_Measures
0,27 to 44,1 on M2_Measures